# EAGLE board ring (EAGLE 9.6.2)
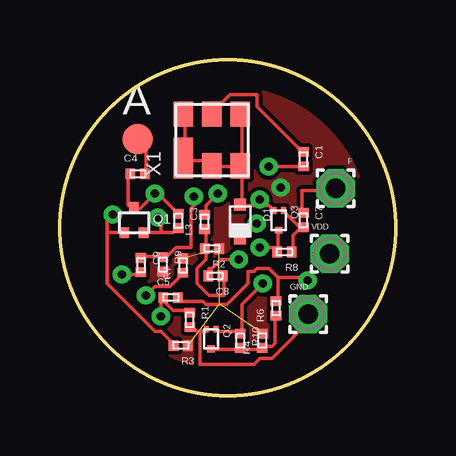
[diagram p0: board, top side]
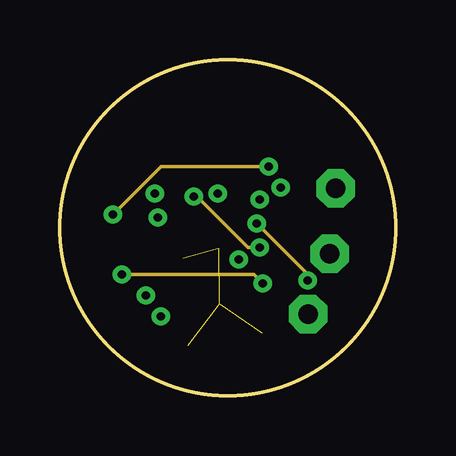
[diagram p1: board, inner layer Route2]
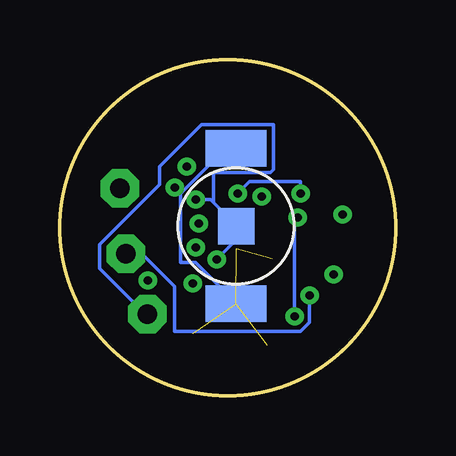
[diagram p2: board, bottom side, seen from below]

Size 14 x 14 mm. Coordinates in mm from the lower left corner, seen from the top.
Outline: circle at 7,7 radius 7
Copper layers (1+2*15+16): Top 0.035mm / dielectric 1.5mm / Route2 0.035mm / dielectric 0.15mm / Route15 0.035mm / dielectric 0.2mm / Bottom 0.035mm
Design rules "default *": minimum track width 6mil, minimum drill 0.35mm, track to track 6mil, track to pad 6mil, pad to pad 6mil, via to via 6mil, smd to smd 6mil, copper to edge 40mil, drill to drill 6mil, minimum pad ring 10mil, minimum via ring 8mil, stop-mask expansion 4mil, vias tented up to drill 0mil, thermal gap 10mil

## Footprints (pad centres in the part's own frame; a part is rotated, then mirrored left to right if it is on the bottom)
B1,27 = smd 1.27 x 1.27: TP 0,0
KEYSTONE2994 = smd 1.52 x 2.54: +1 3.24,0; +2 -3.24,0 | smd 1.52 x 1.52: - 0,0
0201 = smd 0.4 x 0.44: 1 0,0; 2 0.6,0
SOD523 = smd 0.5 x 0.5: A 0.7,0; C -0.7,0
1,6/0,8 = drill 0.813 pad 1.6 octagon: 1 0,0
TSFP-3 = smd 0.4 x 0.45: B -0.4,0; C 0,1.05; E 0.4,0
SOT-923F = smd 0.28 x 0.203: 1 -0.01,0.208; 2 -0.01,-0.198 | smd 0.28 x 0.32: 3 0.81,0
SM3030-6 = smd 1.7 x 0.81: 1 0.85,-0.4 | smd 1.05 x 0.81: 2 0.525,-1.575; 3 0.525,-2.775; 4 2.675,-2.775; 5 2.675,-1.575; 6 2.675,-0.4

## Placement (x,y rotation side)
A  TPB1,27  [B1,27]  3.24,10.69 0 top
BAT1  KEYSTONE2994  [KEYSTONE2994]  6.65,7.07 270 bottom
C1  10n  [0201]  10.16,10.16 270 top
C3  4p7  [0201]  4.94,7.59 270 top
C4  1p5  [0201]  2.94,9.25 0 top
C5  100p  [0201]  4.32,4.09 0 top
C7  1u  [0201]  10.16,7.62 270 top
C8  10n  [0201]  6.78,4.99 180 top
C9  1u  [0201]  3.38,5.74 270 top
D1  SMV1248  [SOD523]  7.52,7.26 90 top
F  [1,6/0,8]  11.5,8.64 0 top
GND  [1,6/0,8]  10.35,3.4 0 top
L3  22 to 24nH  [0201]  6.03,6.95 90 top
Q1  BFR360  [TSFP-3]  3.09,6.79 0 top
Q2  MMBT3904SL  [SOT-923F]  6.3,2.76 270 top
Q3  MMBT3904SL  [SOT-923F]  9.12,7.71 270 top
R1  620  [0201]  5.41,3.46 270 top
R2  68  [0201]  6.64,6.13 180 top
R3  17k8  [0201]  5.34,2.09 180 top
R4  200k  [0201]  8.44,1.99 90 top
R6  300k  [0201]  9.01,3.34 90 top
R7  5.6k  [0201]  5.13,5.12 90 top
R8  2M  [0201]  9.67,5.99 180 top
R9  200k  [0201]  4.29,5.77 270 top
R10  1M  [0201]  7.52,2.59 270 top
VDD  [1,6/0,8]  11.25,5.91 0 top
X1  RO3144E-2  [SM3030-6]  4.75,9.06 90 top

## Library data of the parts
A = testpad
BAT1 C1 C3-C5 C7-C9 D1 L3 Q1 R1-R4 R6-R10 X1 = custom
F GND VDD = wirepad
Q2 Q3 = custom2

## Nets
GND: BAT1.- C8.2 D1.A GND.1 Q2.2 Q3.2 R1.2 X1.1 X1.2 X1.3 X1.4 X1.6
N$1: C1.2 Q1.B R3.2
N$2: C5.2 D1.C R6.2
N$3: R7.1 VDD.1
N$4: C8.1 L3.1 R2.2
N$5: C1.1 X1.5
N$6: C3.1 C4.1 L3.2 Q1.C
N$7: A.TP C4.2
N$8: C7.1 F.1
N$9: Q2.3 R4.1 R6.1 R10.2
N$11: C9.2 Q2.1 R10.1
N$13: C9.1 Q3.3 R8.2 R9.1
N$14: C7.2 Q3.1 R8.1
N$15: C3.2 C5.1 Q1.E R1.1
VCC: BAT1.+1 BAT1.+2 R2.1 R3.1 R4.2 R7.2 R9.2

## Tracks (layer width: path | path; a pad name or v marks a point on that pad's centre or on a via)
GND  (via drill 0.35)
  Top 0.152: 5.84,2.68 5.71,2.68 5.59,2.8 5.46,2.8 R1.2 | 5.84,2.68 6.09,2.68 Q2.2 | 5.84,2.68 5.84,1.3 8.09,1.3 8.34,1.55 8.84,1.55 10.34,3.05 10.34,3.3 GND.1 | X1.6 5.21,11.68 5.21,9.93 X1.1 5.21,9.8 6.09,9.8 6.21,9.68 X1.2 6.34,9.55 7.46,9.55 X1.3 | v7.46,5.68 6.71,5.68 6.34,5.3 6.21,5.3 6.21,5.05 C8.2 | 8.09,7.93 7.59,7.93 D1.A 7.59,8.05 7.59,9.55 X1.3 | 8.09,7.93 8.71,7.93 8.84,7.8 Q3.2 | X1.4 7.59,11.68 7.59,9.68 X1.3 | 8.09,7.93 v8.34,8.18
  Bottom 0.152: v7.46,5.68 6.71,6.43 6.71,7.05 BAT1.- 6.71,7.18 7.59,8.05 | 7.59,8.05 7.71,8.18 v8.34,8.18 | 7.59,8.05 7.59,9.3 5.21,9.3 5.09,9.43 5.09,11.3 8.09,11.3 9.84,9.55 9.84,8.8 12.34,6.3 12.34,5.3 10.46,3.43 GND.1
N$1  (via drill 0.35)
  Top 0.152: 1.96,6.8 1.96,4.68 3.96,2.68 4.21,2.68 4.71,2.18 R3.2 | 1.96,6.8 2.59,6.8 Q1.B | v8.71,9.55 10.09,9.55 C1.2 | v2.21,7.55 1.96,7.3 1.96,6.8
  Route2 0.152: v8.71,9.55 4.21,9.55 v2.21,7.55
N$2  (via drill 0.35)
  Top 0.152: C5.2 5.09,3.93 5.96,3.93 6.09,3.8 6.96,3.8 7.84,4.68 7.84,5.18 8.09,5.18 8.21,5.3 8.71,5.3 9.09,4.93 | 9.09,4.93 9.09,4.05 R6.2 | v8.21,7.18 8.09,7.18 7.59,6.68 D1.C | v10.34,4.8 10.21,4.93 9.09,4.93
  Route2 0.152: v8.21,7.18 10.34,5.05 v10.34,4.8
N$3  (via drill 0.35)
  Top 0.152: v3.59,4.18 3.96,4.55 4.59,4.55 5.09,5.05 R7.1
  Bottom 0.152: v3.59,4.18 3.59,3.05 3.96,2.68 9.21,2.68 9.21,4.55 10.46,5.8 11.21,5.8 VDD.1
N$4
  Top 0.152: L3.1 6.09,6.93 6.09,6.18 R2.2 6.09,6.05 6.09,5.68 5.71,5.3 5.71,4.68 6.21,4.18 6.84,4.18 6.84,4.93 C8.1
N$5
  Top 0.152: C1.1 10.09,10.18 8.21,12.05 8.21,12.55 7.09,12.55 6.34,11.8 X1.5
N$6  (via drill 0.35)
  Top 0.152: v6.59,8.43 6.09,7.93 6.09,7.55 L3.2 | C4.1 2.84,9.18 2.84,7.93 3.09,7.93 Q1.C 3.21,7.8 3.34,7.8 v3.96,8.43 4.09,8.43 4.84,7.68 C3.1
  Bottom 0.152: v6.59,8.43 6.09,8.93 3.96,8.93 v3.96,8.43
N$7
  Top 0.152: C4.2 3.59,9.3 3.59,10.68 3.34,10.68 A.TP
N$8
  Top 0.152: C7.1 10.09,7.68 10.09,8.55 11.46,8.55 F.1
N$9
  Top 0.152: Q2.3 6.34,1.93 7.46,1.93 R10.2 7.59,1.93 8.34,1.93 R4.1 8.46,2.05 8.84,2.05 8.96,2.18 8.96,3.3 R6.1
N$11  (via drill 0.35)
  Top 0.152: Q2.1 6.59,2.68 7.46,2.68 R10.1 7.59,2.68 7.59,3.8 v8.46,4.68 | v2.59,5.05 3.34,5.05 C9.2
  Route2 0.152: v2.59,5.05 8.09,5.05 v8.46,4.68
N$13  (via drill 0.35)
  Top 0.152: Q3.3 9.09,6.8 9.09,6.05 R8.2 8.96,6.05 8.84,6.18 v8.34,6.18 | C9.1 3.46,5.8 4.21,5.8 R9.1 4.34,5.8 4.46,5.8 4.84,6.18 5.46,6.18 5.46,7.8 5.59,7.93 v5.59,8.3
  Route2 0.152: v8.34,6.18 7.84,6.18 5.71,8.3 v5.59,8.3
N$14
  Top 0.152: Q3.1 9.34,7.68 9.96,7.05 10.09,7.05 C7.2 10.09,6.93 9.96,6.93 9.71,6.68 9.71,6.05 R8.1
N$15  (via drill 0.35)
  Top 0.152: 4.21,6.8 3.59,6.8 Q1.E | 4.21,6.8 4.71,6.8 4.84,6.93 C3.2 | 4.21,4.05 4.71,3.55 5.34,3.55 R1.1 | 4.21,6.8 4.21,7.43 v4.09,7.43 | 4.21,4.05 v4.21,3.3 | 4.21,4.05 C5.1
  Bottom 0.152: v4.09,7.43 4.21,7.3 v4.21,3.3
VCC  (via drill 0.35)  (4 unrouted)
  Bottom 0.152: 8.96,8.43 8.96,5.55 8.34,5.55 6.71,3.93 BAT1.+1 | 8.96,8.43 7.09,10.3 6.71,10.3 BAT1.+2 | v9.21,8.68 8.96,8.43
  pour Top: 0,15.24 16.51,15.24 15.24,6.35 13.97,1.27 5.08,-1.27 0,2.54 -1.27,10.16